# Altium PCB design5.PcbDoc
Units mm, origin at the board's own origin, x right, y up, seen from the top; angles counter-clockwise.
Board outline 22.01 x 100 mm, 2 copper layers (Top Layer, Bottom Layer); 54 components, 35 nets, 174 pads, 186 vias.
Unrouted connection lines stored in the file: 53.
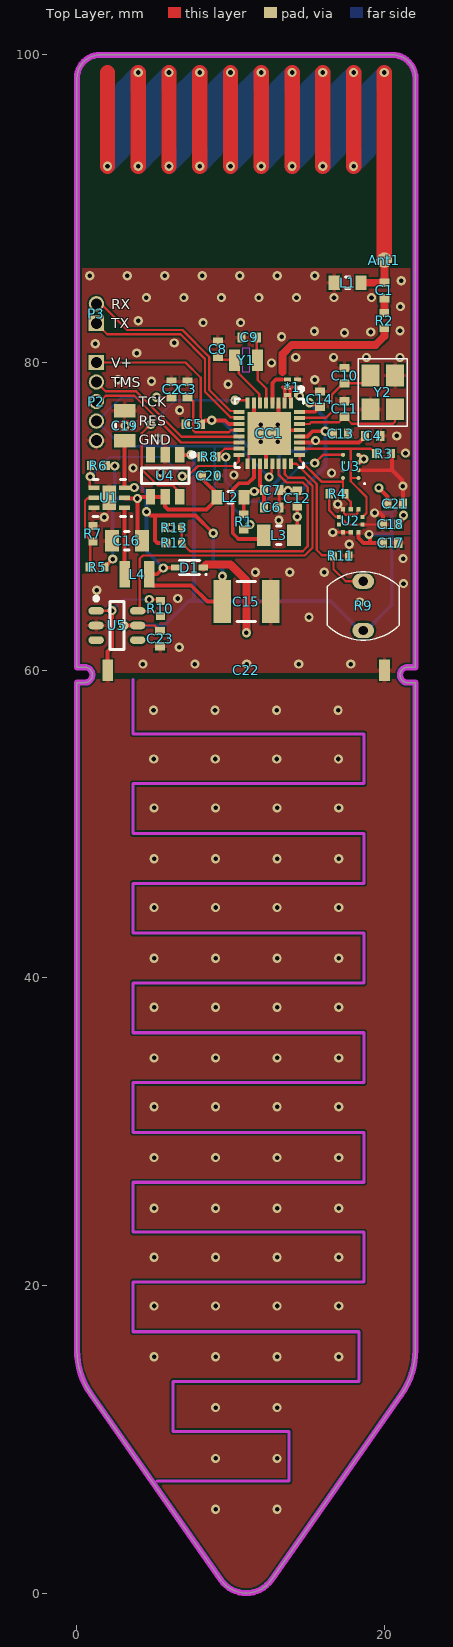
[diagram p0: Top Layer view]
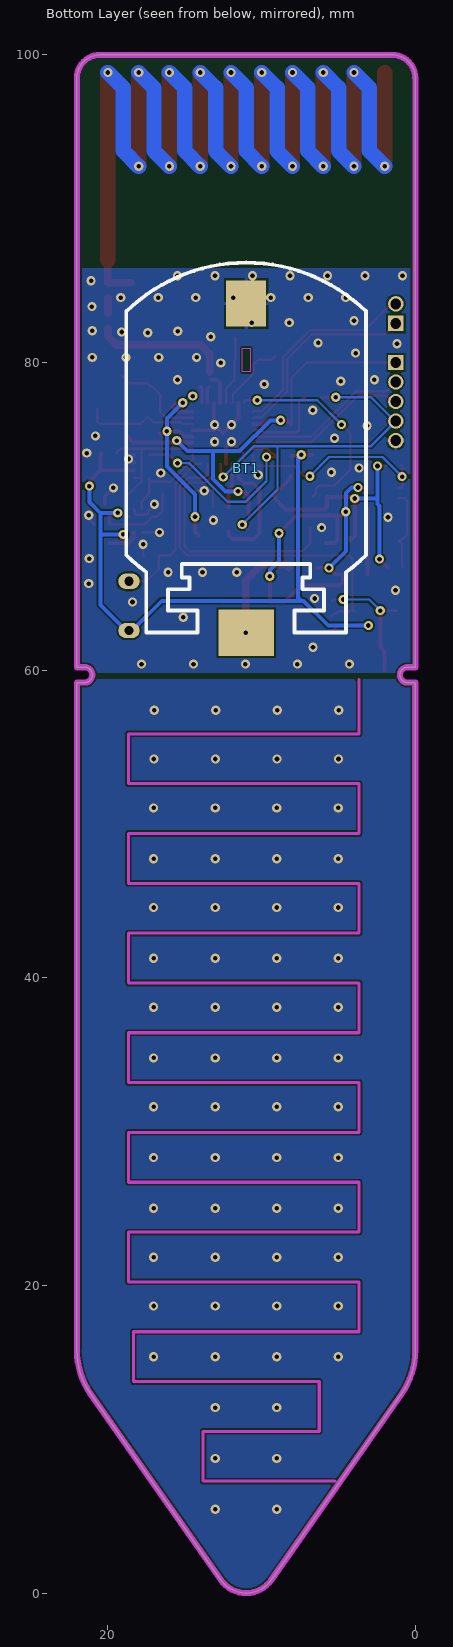
[diagram p1: Bottom Layer view, seen from below]
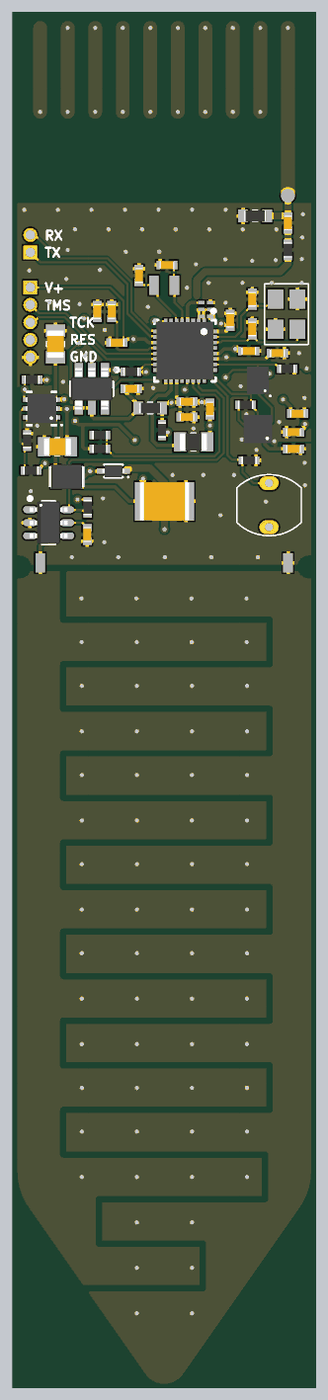
[diagram p2: 3D render of the assembled board from above, using the file's embedded part models]

## Layer stack, top to bottom
Top Solder: solder mask 0.0102, Solder Resist, Dk 3.5
Top Layer: signal copper 0.0356
Dielectric 1: dielectric 0.32, FR-4, Dk 4.8
Bottom Layer: signal copper 0.0356
Bottom Solder: solder mask 0.0102, Solder Resist, Dk 3.5

## Board outline
0.911,12.938 cw(c5.006,15.806) 0.006,15.806 0.006,59.198 0.508,59.198 ccw(c0.508,59.698) 0.501,60.198 0.001,60.198 0.001,98.506 0.006,98.506 cw(c1.506,98.506) 1.506,100.006 20.506,100.006 cw(c20.506,98.506) 22.006,98.506 22.006,60.198 21.513,60.198 ccw(c21.506,59.698) 21.506,59.198 22.006,59.198 22.006,15.806 cw(c17.006,15.806) 21.102,12.938 12.645,0.859 cw(c11.006,2.006) 9.368,0.859

## Design rules (kind name [scope] priority, off if disabled: settings)
Clearance [All] p1: gap=0.127 ignorepadtopadclearanceinfootprint=FALSE
DiffPairsRouting [All] p1: maxlimit=0.127 minlimit=0.127 mostfreqgap=0.127 toplayer_minwidth=0.218 toplayer_maxwidth=0.218 toplayer_prefwidth=0.218 bottomlayer_minwidth=0.218 bottomlayer_maxwidth=0.218 bottomlayer_prefwidth=0.218 maxuncoupledlength=12.7
Height Height_1 [InComponent('U2')] p1: minheight=0 maxheight=100 prefheight=12.7
Height [All] p2: minheight=0 maxheight=25.4 prefheight=12.7
HoleSize [All] p1: absolutevalues=TRUE maxlimit=2.54 minlimit=0.3 maxpercent=80.000 minpercent=20.000
MinimumSolderMaskSliver [All] p1: minsoldermaskwidth=0.127
PlaneClearance [All] p1: clearance=0.127
PlaneConnect [All] p1: planeconnectstyle=Direct reliefexpansion=0.508 reliefentries=4 reliefconductorwidth=0.254 reliefairgap=0.254
PolygonConnect [All] p1: thpad.connectstyle=Relief thpad.reliefconductorwidth=0.254 thpad.reliefentries=4 thpad.polygonreliefangle="90 Angle" thpad.airgapwidth=0.127 smdpad.connectstyle=Relief smdpad.reliefconductorwidth=0.254 smdpad.reliefentries=4 smdpad.polygonreliefangle="90 Angle" smdpad.airgapwidth=0.127 via.connectstyle=Direct via.reliefconductorwidth=0.254 via.reliefentries=4 via.polygonreliefangle="90 Angle" via.airgapwidth=0.254
RoutingVias [All] p1: holewidth=0.4 width=0.7 viastyle="Through Hole" minholewidth=0.3 minwidth=0.6 maxholewidth=0.5 maxwidth=0.8
SilkToSilkClearance [All] p1: silktosilkclearance=0.152
SolderMaskExpansion [All] p1: expansion=0.127
Width Width_50ohm [InNet('Net*1_1') OR InNet('NetAnt1_1')] p1: maxlimit=1.27 minlimit=0.508 preferedwidth=0.508 minimp=50.000000 maximp=50.000000 favimp=50.000000
Width [All] p2: maxlimit=0.254 minlimit=0.127 preferedwidth=0.152 minimp=50.000000 maximp=50.000000 favimp=50.000000
23 further rules are at their usual default settings.

## Classes and differential pairs
differential pair RF: +RF_P -RF_N

## Components (designator, comment, footprint, x,y, rotation, side; value= is the part's Value field where it differs from the comment)
*1 "0850BM14E0016" 0850BM14E0016 14.021,78.392 r90 top
Ant1 "Antenna 868 Helix" ANTENNA_868_HELIX 19.99,86.665 r180 top locked net-tie
BT1 "Battery Coin Cell" S8421-45R 10.998,64 r180 bottom
C1 "Cap" "0402 (CAP)" 19.99,84.692 r90 top value=8.2pF
C2 "Cap" "0402 (CAP)" 6.147,78.257 r90 top value=100nF
C3 "Cap" "0402 (CAP)" 7.188,78.257 r270 top value=1uF
C4 "Cap" "0402 (CAP)" 19.228,75.235 r180 top value=100nF
C5 "Cap" "0402 (CAP)" 7.569,75.997 r0 top value=100nF
C6 "Cap" "0402 (CAP)" 12.662,70.591 r180 top value=22uF
C7 "Cap" "0402 (CAP)" 12.662,71.709 r180 top value=100nF
C8 "Cap" "0402 (CAP)" 9.169,80.874 r270 top value=12pF
C9 "Cap" "0402 (CAP)" 11.201,81.636 r0 top value=12pF
C10 "DNM" "0402 (CAP)" 17.399,79.146 r270 top value=12pF
C11 "DNM" "0402 (CAP)" 17.399,76.987 r270 top value=12pF
C12 "Cap" "0402 (CAP)" 14.326,71.171 r270 top value=22uF
C13 "Cap" "0402 (CAP)" 17.145,75.387 r180 top value=100nF
C14 "Cap" "0402 (CAP)" 15.799,77.622 r270 top value=100nF
C15 "GRM32EC70J107ME15L" "1210 (CAP)" 11.024,64.465 r180 top value=100uF
C16 "Cap" "0805 (CAP)" 3.251,68.428 r0 top value=22uF
C17 "Cap" "0402 (CAP)" 20.396,68.275 r180 top value=100nF
C18 "Cap" "0402 (CAP)" 20.396,69.494 r180 top value=100nF
C19 "Cap" "0805 (CAP)" 3.099,75.895 r270 top value=10uF
C20 "Cap" "0402 (CAP)" 8.611,72.644 r180 top value=1uF
C21 "Cap" "0402 (CAP)" 20.696,70.841 r0 top value=100nF
C22 "Chumidity" SOIL_CAP 11,17 r0 top locked net-tie value=1pF
C23 "Cap" "0402 (CAP)" 5.41,62.052 r90 top value=100nF
CC1 "CC1310F32RSMR" CC1310F32RSMR 12.506,75.406 r270 top
D1 "RB751S40T5G" SOD-523 7.315,66.675 r180 top
L1 "Inductor" "0603 (IND)" 17.602,85.192 r180 top value=68nH
L2 "BLM18HE152SN1D" "0603 (IND)" 9.982,71.247 r0 top value="1500 Ohm"
L3 "MLZ2012N6R8LT000" "0805 (IND)" 13.132,68.783 r0 top value=6.8uH
L4 "Inductor" SRN2009T 3.912,66.243 r180 top value=3.3uH
P2 "cJTAG" 5pin-1.27 1.27,77.47 r270 top
P3 "UART" 2pin-1.27 1.27,83.185 r90 top
R1 "Res1" "0402 (RES)" 10.846,69.647 r90 top value=100K
R2 "" "0402 (RES)" 19.99,82.728 r90 top value=0
R3 "Res1" "0402 (RES)" 19.939,74.092 r0 top value=4.7K
R4 "Res1" "0402 (RES)" 16.916,71.476 r180 top value=4.7K
R5 "DNM" "0402 (RES)" 1.321,66.713 r180 top value=0
R6 "Res1" "0402 (RES)" 1.397,73.304 r180 top value=10K
R7 "DNM" "0402 (RES)" 1.041,68.877 r90 top value=0
R8 "Res1" "0402 (RES)" 8.591,73.889 r0 top value=4.7K
R9 "200K - 10K" Photoresistor 18.618,64.186 r90 top
R10 "Rcharge" "0402 (RES)" 5.43,64.008 r270 top value=1k
R11 "Res1" "0402 (RES)" 17.17,67.437 r180 top value=4.7K
R12 "Res1" "0402 (RES)" 6.325,68.275 r180 top value=4.7K
R13 "Res1" "0402 (RES)" 6.325,69.274 r0 top value=4.7K
U1 "TPS61291" TPS61291 2.1,71.206 r180 top
U2 "BMP388, Pressure sensor" BMP388 17.805,69.723 r270 top
U3 "HDC1010, Humidity, Temp" HDC1010 17.805,73.254 r180 top
U4 "TPS22860" SOT23-5 5.74,72.644 r270 top
U5 "74LVC2G14, Inverting Schmitt Trigger" 74LVC2G14 2.603,62.912 r0 top
Y1 "FC-12M 32.7680KA-A3" "FC-12M 32.7680KA-A3" 10.998,80.162 r0 top
Y2 "TSX-3225 24.0000MF20G-AC3" "TSX-3225 24.0000MF20G-AC3" 19.886,78.062 r270 top

## Footprints (in the part's own frame and the unit in brackets; to place one, negate y for a bottom-side part, rotate by r counter-clockwise, add the part's x,y. Pads: shape width x height; smd on the part's side, far side on the other; paste and mask are expansions set on the pad)
2pin-1.27 [mm]
  rect 1x1 hole 0.7: 1(-0.635,0)
  round 1 hole 0.7: 2(0.635,0)
5pin-1.27 [mm]
  rect 1x1 hole 0.7: 1(-2.54,0)
  round 1 hole 0.7: 2(-1.27,0) 3(0,0) 4(1.27,0) 5(2.54,0)
74LVC2G14 [mm] "TSOP, 6-Leads, Body 2,90x1,50mm, Pitch 0,95mm, IPC Medium Density"
  oval 1x0.5 smd: 1(-1.35,0.95) 2(-1.35,0) 3(-1.35,-0.95) 4(1.35,-0.95) 5(1.35,0) 6(1.35,0.95)
  silkscreen extent -1.47,-1.55 0.45,1.87, body extent -1.38,-1.55 1.38,1.55, height 1.1
"0402 (CAP)" [mm] "Chip Capacitor, 2-Leads, Body 1,60x0,80mm, IPC Medium Density"
  rect 0.54x0.64 smd: 1(-0.5,0) 2(0.5,0)
  body extent -0.55,-0.3 0.55,0.3, height 0.4
"0402 (RES)" [mm] "Chip Resistor, 2-Leads, Body 1,00x0,50mm, IPC Medium Density"
  rect 0.5x0.6 smd: 1(-0.5,0) 2(0.5,0)
  body extent -0.55,-0.3 0.55,0.3, height 0.4
"0603 (IND)" [mm]
  rect 0.72x0.94 smd: 1(-0.87,0) 2(0.87,0)
  silkscreen extent -0.15,-0.37 0.15,0.37, body extent -0.8,-0.4 0.8,0.4, height 0.6
"0805 (CAP)" [mm] "Chip Capacitor, 2-Leads, Body 2,00x1,25mm, IPC Medium Density"
  rect 0.9x1.4 smd: 1(-0.975,0) 2(0.975,0)
  silkscreen extent -0.15,-0.6 0.15,0.6, body extent -1,-0.63 1,0.63, height 0.6
"0805 (IND)" [mm] "Chip Inductor, 2-Leads, Body 2,00x1,25mm, IPC Medium Density"
  rect 0.9x1.39 smd: 1(-0.98,0) 2(0.98,0)
  silkscreen extent -0.15,-0.6 0.15,0.6, body extent -1,-0.63 1,0.63, height 0.6
0850BM14E0016 [mm]
  rect 0.25x0.45 smd: 1(0.5,0.325) 2(0,0.325) 3(-0.5,0.325) 4(-0.5,-0.325) 5(0,-0.325) 6(0.5,-0.325)
  body extent -0.74,-0.66 0.74,0.66, height 1
"1210 (CAP)" [mm] "Chip Capacitor, 2-Leads, Body 3,20x2,50mm, IPC Medium Density"
  rect 1.15x2.8 smd: 1(-1.575,0) 2(1.575,0)
  silkscreen extent -0.6,-1.3 0.6,1.3, body extent -1.8,-1.4 1.8,1.4, height 2.8
ANTENNA_868_HELIX [mm]
  round 1 smd: 1(0,0)
  Top Layer lines w1: 18,-6.1 18,-12.2 ; 16,-6.1 16,-12.2 ; 14,-6.1 14,-12.2 ; 12,-6.1 12,-12.2 ; 10,-6.1 10,-12.2 ; 8,-6.1 8,-12.2 ; 6,-6.1 6,-12.2 ; 4,-6.1 4,-12.2 ; 2,-6.1 2,-12.2 ; 0,0 0,-12.2
  Bottom Layer lines w1: 18,-6.1 17,-7.1 17,-11.2 16,-12.2 ; 16,-6.1 15,-7.1 15,-11.2 14,-12.2 ; 14,-6.1 13,-7.1 13,-11.2 12,-12.2 ; 12,-6.1 11,-7.1 11,-11.2 10,-12.2 ; 10,-6.1 9,-7.1 9,-11.2 8,-12.2 ; 8,-6.1 7,-7.1 7,-11.2 6,-12.2 ; 6,-6.1 5,-7.1 5,-11.2 4,-12.2 ; 4,-6.1 3,-7.1 3,-11.2 2,-12.2 ; 2,-6.1 1,-7.1 1,-11.2 0,-12.2
BMP388 [mm] "LGA, 10-Leads, Body 2,00x2,00mmx0,80mm, Pitch 0,50mm"
  rect 0.275x0.275 smd: 1(0.25,0.762) 2(-0.25,0.762) 3(-0.75,0.5) 4(-0.75,0) 5(-0.75,-0.5) 6(-0.25,-0.763) 7(0.25,-0.763) 8(0.75,-0.5) 9(0.75,0) 10(0.75,0.5)
  body extent -1.02,-1.03 1.65,1.02, height 30
CC1310F32RSMR [mm] "QFN, 32-Leads, Body 4,00x4,00mm, Pitch 0,40mm, Thermal Pad 2,80x2,80mm, IPC Medium Density"
  rect 0.7x0.26 smd: 1(-1.975,1.4) 2(-1.975,1) 3(-1.975,0.6) 4(-1.975,0.2) 5(-1.975,-0.2) 6(-1.975,-0.6) 7(-1.975,-1) 8(-1.975,-1.4) 17(1.975,-1.4) 18(1.975,-1) 19(1.975,-0.6) 20(1.975,-0.2) 21(1.975,0.2) 22(1.975,0.6) 23(1.975,1) 24(1.975,1.4)
  rect 0.26x0.7 smd: 9(-1.4,-1.975) 10(-1,-1.975) 11(-0.6,-1.975) 12(-0.2,-1.975) 13(0.2,-1.975) 14(0.6,-1.975) 15(1,-1.975) 16(1.4,-1.975) 25(1.4,1.975) 26(1,1.975) 27(0.6,1.975) 28(0.2,1.975) 29(-0.2,1.975) 30(-0.6,1.975) 31(-1,1.975) 32(-1.4,1.975)
  rect 2.8x2.8 smd: 33(0,0)
  silkscreen extent -3,-2.22 2.22,2.22, body extent -2.08,-2.08 2.08,2.08, height 1
"FC-12M 32.7680KA-A3" [mm]
  rect 0.7x1.4 smd: 1(-0.75,0) 2(0.75,0)
  Keep-Out Layer region: -0.254,-0.762 0.254,-0.762 0.254,0.762 -0.254,0.762
  body extent -1.19,-0.79 1.19,0.79, height 1
HDC1010 [mm] "BGA, 8-Leads, Body 1,59x2,04mmx0,68mm, Pitch 0,50mm"
  round 0.26 smd: A1(-0.5,0.75) A2(0.5,0.75) B1(-0.5,0.25) B2(0.5,0.25) C1(-0.5,-0.25) C2(0.5,-0.25) D1(-0.5,-0.75) D2(0.5,-0.75)
  silkscreen extent -0.95,1.08 -0.85,1.17, body extent -0.79,-1.02 0.79,1.02, height 0.67
Photoresistor [mm]
  oval 1x1.4 hole 0.6: 1(-1.6,0) 2(1.6,0)
  silkscreen extent -2.22,-2.35 2.22,2.35
S8421-45R [mm]
  rect 3.6x3 smd: 1(0,-1.556)
  rect 2.6x3 smd: 2(0,19.844)
  silkscreen extent -7.8,-1.56 7.8,22.5
SOD-523 [mm] "Molded Diode, 2-Leads, Body 1,20x0,80mm, IPC Medium Density"
  rect 0.6x0.4 smd: 1(-0.9,0) 2(0.9,0)
  silkscreen extent -1.12,-0.45 0.65,0.5, body extent -0.87,-0.45 0.87,0.45, height 0.7
SOIL_CAP [mm]
  rect 0.7x1.4 smd: 1(-9,43) 2(9,43)
  Keep-Out Layer lines w0.2: -7.339,42.393 -7.339,38.867 7.661,38.867 7.661,35.628 -7.339,35.628 -7.339,32.389 7.661,32.389 7.661,29.15 -7.339,29.15 -7.339,25.911 7.661,25.911 7.661,22.672 -7.339,22.672 -7.339,19.434 7.661,19.434 7.661,16.195 -7.339,16.195 -7.339,12.956 7.661,12.956 7.661,9.717 -7.339,9.717 -7.339,6.478 7.661,6.478 7.661,3.239 -7.339,3.239 -7.339,0 7.339,0 7.339,-3.239 -4.749,-3.239 -4.749,-6.478 2.803,-6.478 2.803,-9.717 -5.777,-9.717
SOT23-5 [mm] "SOT23, 5-Leads, Body 2,90x2,80mm, Pitch 0,95mm, IPC Medium Density"
  rect 1x0.6 smd: 1(-1.375,0.95) 2(-1.375,0) 3(-1.375,-0.95) 4(1.375,-0.95) 5(1.375,0) 6(1.375,0.95)
  silkscreen extent -1.5,-1.55 0.5,1.93, body extent -1.5,-1.53 1.5,1.53, height 1.45
SRN2009T [mm] "Molded Inductor, 2-Leads, Body 2,00x1,60mm, IPC Medium Density"
  rect 0.7x1.7 smd: 1(-0.8,0) 2(0.8,0)
  body extent -1.32,-0.9 1.32,0.9, height 0.95
TPS61291 [mm] "SON, 6-Leads, Body 2,00x2,00mm, Pitch 0,65mm, Thermal Pad 1,60x0,89mm, IPC Medium Density"
  rect 0.7x0.3 smd: 1(-0.995,0.65) 2(-0.995,0) 3(-0.995,-0.65) 4(0.995,-0.65) 5(0.995,0) 6(0.995,0.65)
  rect 0.89x1.6 smd: 7(0,0)
  silkscreen extent -1.5,-1.2 1.05,1.25, body extent -1.13,-1.05 1.13,1.05, height 0.8
"TSX-3225 24.0000MF20G-AC3" [mm]
  rect 1.4x1.15 smd: 1(-1.1,-0.8) 2(1.1,-0.8) 3(1.1,0.8) 4(-1.1,0.8)
  silkscreen extent -2.2,-1.6 2.2,1.6, body extent -2.2,-1.6 2.2,1.6, height 1

## Part data
C1: "Capacitor", Part Number=250R05L8R2CV4T, LatestRevisionDate=17-Jul-2002, LatestRevisionNote="Re-released for DXP Platform.", PackageDescription="Radial Cap, Thru-Hole; 2 Leads; 0.3 in Pin Spacing", PackageReference=RAD-0.3, Published=8-Jun-2000, Publisher="Altium Limited"
C2 C4 C5 C7 C13 C14 C17 C18 C21 C23: "Capacitor", Part Number=GCM155R71C104KA55J, LatestRevisionDate=17-Jul-2002, LatestRevisionNote="Re-released for DXP Platform.", PackageDescription="Radial Cap, Thru-Hole; 2 Leads; 0.3 in Pin Spacing", PackageReference=RAD-0.3, Published=8-Jun-2000, Publisher="Altium Limited"
C3 C19 C20: "Capacitor", LatestRevisionDate=17-Jul-2002, LatestRevisionNote="Re-released for DXP Platform.", PackageDescription="Radial Cap, Thru-Hole; 2 Leads; 0.3 in Pin Spacing", PackageReference=RAD-0.3, Published=8-Jun-2000, Publisher="Altium Limited"
C6 C12 C16: "Capacitor", Part Number=GRM219B31A226MEA0D, LatestRevisionDate=17-Jul-2002, LatestRevisionNote="Re-released for DXP Platform.", PackageDescription="Radial Cap, Thru-Hole; 2 Leads; 0.3 in Pin Spacing", PackageReference=RAD-0.3, Published=8-Jun-2000, Publisher="Altium Limited"
C8 C9: "Capacitor", Part Number=GCM1555G1H120JA16D, LatestRevisionDate=17-Jul-2002, LatestRevisionNote="Re-released for DXP Platform.", PackageDescription="Radial Cap, Thru-Hole; 2 Leads; 0.3 in Pin Spacing", PackageReference=RAD-0.3, Published=8-Jun-2000, Publisher="Altium Limited"
C10 C11: library part Cap, "Capacitor", Part Number=GCM1555G1H120JA16D, LatestRevisionDate=17-Jul-2002, LatestRevisionNote="Re-released for DXP Platform.", PackageDescription="Radial Cap, Thru-Hole; 2 Leads; 0.3 in Pin Spacing", PackageReference=RAD-0.3, Published=8-Jun-2000, Publisher="Altium Limited"
C15: library part Cap, "Capacitor", Part Number=GCM155R71C104KA55J, LatestRevisionDate=17-Jul-2002, LatestRevisionNote="Re-released for DXP Platform.", PackageDescription="Radial Cap, Thru-Hole; 2 Leads; 0.3 in Pin Spacing", PackageReference=RAD-0.3, Published=8-Jun-2000, Publisher="Altium Limited"
C22: library part Cap, "Capacitor", LatestRevisionDate=17-Jul-2002, LatestRevisionNote="Re-released for DXP Platform.", PackageDescription="Radial Cap, Thru-Hole; 2 Leads; 0.3 in Pin Spacing", PackageReference=RAD-0.3, Published=8-Jun-2000, Publisher="Altium Limited"
D1: library part "D Schottky", "Schottky Diode", Code_JEDEC=DO-214-AA, LatestRevisionDate=17-Jul-2002, LatestRevisionNote="Re-released for DXP Platform.", PackageDescription="DO-214-AA/SMB; 2 C-Bend Leads; Body 5.3 x 3.6 mm, inc. leads (LxW)", PackageReference=SMB, Part Number=RB751S40T5G, Published=8-Jun-2000, Publisher="Altium Limited"
L1: Part Number=PE-0603CD680GTT, Code_IEC=1005, Code_JEITA=0603, LatestRevisionDate=29-May-2009, LatestRevisionNote="IPC-7351 Footprint Added.", PackageDescription="Chip Inductor", PackageReference=0603, Published=8-Jun-2000, Publisher="Altium Limited"
L2: library part "Inductor Iron", "Magnetic-Core Inductor", LatestRevisionDate=17-Jul-2002, LatestRevisionNote="Re-released for DXP Platform.", PackageDescription="Axial Device, Thru-Hole; 2 Leads; 0.9 in Pin Spacing", PackageReference=AXIAL-0.9, Part Number=BLM18HE152SN1D, Published=24-Mar-1999, Publisher="Altium Limited"
L3: library part Inductor, "Inductor", Code_IEC=1005, Code_JEITA=0402, LatestRevisionDate=29-May-2009, LatestRevisionNote="IPC-7351 Footprint Added.", PackageDescription="Chip Inductor", PackageReference=0402-A, Part Number=MLZ2012N6R8LT000, Published=8-Jun-2000, Publisher="Altium Limited"
L4: Part Number=SRN2009T, Code_IEC=1005, Code_JEITA=0402, LatestRevisionDate=29-May-2009, LatestRevisionNote="IPC-7351 Footprint Added.", PackageDescription="Chip Inductor", PackageReference=0402-A, Published=8-Jun-2000, Publisher="Altium Limited"
P2: library part "Header 5", "Header, 5-Pin", LatestRevisionDate=17-Jul-2002, LatestRevisionNote="Re-released for DXP Platform.", Publisher="Altium Limited"
P3: library part "Header 2", "Header, 2-Pin", LatestRevisionDate=17-Jul-2002, LatestRevisionNote="Re-released for DXP Platform.", Publisher="Altium Limited"
R1: "Resistor", Part Number=CRCW0402100KFKED, LatestRevisionDate=17-Jul-2002, LatestRevisionNote="Re-released for DXP Platform.", PackageDescription="Axial Device, Thru-Hole; 2 Leads; 0.3 in Pin Spacing", PackageReference=AXIAL-0.3, Published=8-Jun-2000, Publisher="Altium Limited"
R2 R5 R7: library part Res1, "Resistor", Part Number=ERJ-2GE0R00X, LatestRevisionDate=17-Jul-2002, LatestRevisionNote="Re-released for DXP Platform.", PackageDescription="Axial Device, Thru-Hole; 2 Leads; 0.3 in Pin Spacing", PackageReference=AXIAL-0.3, Published=8-Jun-2000, Publisher="Altium Limited"
R3 R4 R8 R11 R12 R13: "Resistor", Part Number=CRG0402F4K7, LatestRevisionDate=17-Jul-2002, LatestRevisionNote="Re-released for DXP Platform.", PackageDescription="Axial Device, Thru-Hole; 2 Leads; 0.3 in Pin Spacing", PackageReference=AXIAL-0.3, Published=8-Jun-2000, Publisher="Altium Limited"
R6: "Resistor", Part Number=CRCW040210K0JNEDC, LatestRevisionDate=17-Jul-2002, LatestRevisionNote="Re-released for DXP Platform.", PackageDescription="Axial Device, Thru-Hole; 2 Leads; 0.3 in Pin Spacing", PackageReference=AXIAL-0.3, Published=8-Jun-2000, Publisher="Altium Limited"
R9: library part "Photo Resistor"
R10: library part Res1, "Resistor", Part Number=RC0402FR-7W1KL, LatestRevisionDate=17-Jul-2002, LatestRevisionNote="Re-released for DXP Platform.", PackageDescription="Axial Device, Thru-Hole; 2 Leads; 0.3 in Pin Spacing", PackageReference=AXIAL-0.3, Published=8-Jun-2000, Publisher="Altium Limited"
U1: Part Number=TPS61291DRVR
U2: library part BMP388, Part Number=BMP388
U3: library part HDC1010, Part Number=HDC1010YPAR
U4: Part Number=TPS22860DBVR
U5: library part 74LVC2G14, Part Number=74LVC2G14GV,125
Y1: library part XTAL, "Crystal Oscillator", LatestRevisionDate=17-Jul-2002, LatestRevisionNote="Re-released for DXP Platform.", PackageDescription="Crystal, Thru-Hole; 2 Leads; Body 3.1 x 8.2 mm (Dia.xH)", PackageReference=R38, Part Number="FC-12M 32.7680KA-A3", Published=8-Jun-2000, Publisher="Altium Limited"
Y2: library part Crystal, Part Number="TSX-3225 24.0000MF20G-AC3"
*1: Part Number=0850BM14E0016
CC1: Part Number=CC1310F32RSMR

## Via types
v1: diameter 0.6, hole 0.3, Top Layer to Bottom Layer, tented both sides, 185 vias
v2: diameter 0.6, hole 0.3, Top Layer to Bottom Layer, 1 vias

## Nets (pads, with @x,y where several pads share a name; then routed paths per layer and width w, separated by ;. In a path a pad name is that pad's centre, name@x,y a point inside that pad or via, vN(x,y) a via of type N, cw(c..) or ccw(c..) an arc to the next point about the centre after c; other vN are vias at no path point)
Bat_Sense: CC1.22 R12.1 R13.2 | length 16.3
  Top Layer w0.152: R13.2 R12.1 7.358,67.742 14.681,67.742 15.011,68.072 15.011,71.882 14.681,72.212 13.626,72.212 13.106,72.732 CC1.22
DCDC_SW: CC1.18 L3.1 | length 8
  Top Layer w0.254: CC1.18 11.506,72.542 11.125,72.161 10.54,72.161 10.135,71.756 10.135,68.91 10.363,68.682 10.363,68.678 10.512,68.529 11.898,68.529 L3.1 L3.1@12.152,69.028
DRDYn: CC1.15 R8.2 U3.D2 | length 13.3
  Top Layer w0.152: v1(9.677,73.863) 9.116,73.863 R8.2 9.091,73.939 9.264,74.112 9.314,74.112 9.608,74.406 CC1.15 ; v1(15.469,73.47) 16.002,74.004 U3.D2
  Bottom Layer w0.152: v1(9.677,73.863) 9.677,72.313 11.046,70.945 12.195,70.945 14.72,73.47 v1(15.469,73.47)
EN_BYP: CC1.16 R6.2 U1.4 | length 13.4
  Top Layer w0.152: R6.2@0.897,73.354 R6.2 0.762,73.169 0.864,73.068 v1(0.864,72.593) 0.831,72.561 0.831,71.929 0.905,71.856 U1.4 ; v1(6.858,72.619) 7.208,72.619 7.868,73.279 10.197,73.279 10.531,73.614 CC1.16
  Bottom Layer w0.152: v1(0.864,72.593) 2.134,73.863 5.613,73.863 v1(6.858,72.619)
GND: *1.5 *1.6 BT1.2 C2.2 C3.1 C4.1 C5.1 C6.1 C7.1 C8.1 C9.1 C10.1 C11.1 C12.1 C13.1 C14.1 C15.1 C16.1 C17.1 C18.1 C19.1 C20.1 C21.1 C22.2 C23.1 CC1.3 CC1.7 CC1.17 CC1.20 CC1.29 CC1.33 L1.2 P2.5 R7.2 R11.1 R13.1 U1.6 U1.7 U2.3 U2.5 U2.8 U2.9 U3.B2 U3.C1 U3.D1 U4.2 U5.2 Y2.2 Y2.4 | length 19
  Top Layer w0.127: CC1.17 11.17,73.495 11.17,74.07 v1(11.956,74.856)
  Top Layer w0.152: R13.1 6.01,69.088 6.096,69.174 v2(6.096,69.274) ; C6.1 C7.1 13.2,71.671 v1(13.723,71.671) C12.1 ; v1(16.637,68.961) 16.643,68.967 17.299,68.967 U2.8 U2.9 ; v1(16.967,70.79) 16.989,70.79 U2.5 17.367,70.412 17.367,70.212 17.474,70.104 18.136,70.104 18.244,70.212 18.244,70.412 U2.3 ; R11.1 17.704,67.47 v1(17.704,68.199)
  Top Layer w0.254: CC1.7 11.506,76.406 v1(11.956,75.956) CC1.33 v1(13.056,75.956) 13.106,76.006 CC1.3 ; v1(11.956,74.856) 12.306,74.506 CC1.20 ; CC1.33@13.056,75.606 CC1.29 ; U3.C1 18.411,73.504 v1(18.644,73.736) 18.376,74.004 U3.D1 ; v1(19.634,71.857) 20.196,71.295 C21.1 ; C18.1 21.234,69.833 v1(21.234,70.079)
  other v1: 9.018,5.461 13.018,5.461 9.018,12.065 13.018,12.065 5.018,18.669 9.018,18.669 13.018,18.669 17.018,18.669 5.018,25.019 9.018,25.019 13.018,25.019 17.018,25.019 5.018,31.623 9.018,31.623 13.018,31.623 17.018,31.623 5.018,38.1 9.018,38.1 13.018,38.1 17.018,38.1 5.018,44.577 9.018,44.577 13.018,44.577 17.018,44.577 5.018,51.054 9.018,51.054 13.018,51.054 17.018,51.054 4.982,57.404 8.982,57.404 12.982,57.404 16.982,57.404 4.293,60.401 7.671,60.401 11.049,60.401 14.427,60.401 17.805,60.401 6.655,61.493 15.088,63.449 18.39,64.44 6.553,64.668 1.295,65.202 21.234,65.634 11.608,66.37 13.843,66.37 16.078,66.37 21.209,67.259 13.132,69.759 1.778,69.952 10.211,72.695 16.561,72.822 5.461,72.873 3.658,73.152 21.361,74.117 13.056,74.856 5.258,75.082 20.803,75.235 3.144,75.895 6.68,76.911 9.83,78.588 4.851,78.791 2.667,78.892 15.469,78.892 12.649,79.985 14.224,80.34 16.688,80.34 18.821,80.34 21.006,80.34 3.886,80.62 1.194,81.229 6.325,81.28 13.31,81.686 17.399,81.94 19.101,81.991 15.443,82.042 21.006,82.067 8.204,82.601 10.643,82.601 3.988,82.728 21.031,83.642 4.521,84.226 6.96,84.226 9.398,84.226 11.836,84.226 14.275,84.226 16.713,84.226 19.152,84.226 21.082,85.319 0.838,85.649 3.277,85.649 5.715,85.649 8.153,85.649 10.592,85.649 13.03,85.649 15.469,85.649
JTAG_TCK: CC1.14 P2.3 | length 10.7
  Top Layer w0.152: P2.3 1.499,77.47 1.88,77.851 3.734,77.851 6.778,74.806 CC1.14
JTAG_TMS: CC1.13 P2.2 | length 10.7
  Top Layer w0.152: P2.2 1.88,78.13 3.861,78.13 6.807,75.184 10.509,75.184 CC1.13
Net*1_1: *1.1 R2.1 | length 8.8
  Top Layer w0.508: 13.371,79.398 13.371,80.554 13.97,81.153 19.431,81.153 19.99,81.712 R2.1
Net*1_2: *1.2 CC1.4 | length 2
  Top Layer w0.254: CC1.4 12.706,78.67 12.929,78.892 13.326,78.892
NetAnt1_1: Ant1.1 C1.2 L1.1 | length 2.8
  Top Layer w0.508: L1.1 C1.2 19.995,85.197 19.995,86.495 Ant1.1@20,86.5
  other v1: 1.99,92.765 3.99,92.765 5.99,92.765 7.99,92.765 9.99,92.765 11.99,92.765 13.99,92.765 15.99,92.765 17.99,92.765 3.99,98.865 5.99,98.865 7.99,98.865 9.99,98.865 11.99,98.865 13.99,98.865 15.99,98.865 17.99,98.865 19.99,98.865
NetBT1_1: BT1.1 D1.1 | length 6.7
  Top Layer w0.508: D1.1 8.215,66.683 8.41,66.878 9.982,66.878 11.024,65.837 v1(11.024,62.433)
NetC1_1: C1.1 R2.2 | length 1
  Top Layer w0.508: R2.2 C1.1
NetC3_2: C3.2 CC1.12 | length 5.6
  Top Layer w0.152: C3.2@7.188,77.707 7.238,77.707 7.188,77.657 7.407,77.657 7.569,77.495 7.569,75.584 7.69,75.463 9.855,75.463 9.998,75.606 CC1.12
NetC8_2: C8.2 CC1.6 Y1.1 | length 4.6
  Top Layer w0.152: C8.2 9.363,80.18 10.231,80.18 Y1.1 10.522,79.889 10.522,79.292 11.854,77.96 11.854,77.433 CC1.6
NetC9_2: C9.2 CC1.5 Y1.2 | length 4.5
  Top Layer w0.152: C9.2 11.701,80.209 Y1.2 11.76,80.15 11.76,78.867 12.306,78.321 CC1.5
NetC10_2: C10.2 CC1.31 Y2.1 | length 6.4
  Top Layer w0.152: CC1.31 16.183,76.406 16.586,76.81 16.586,77.927 17.112,78.453 17.205,78.453 C10.2 17.416,78.663 18.587,78.663 Y2.1
NetC11_2: C11.2 CC1.30 Y2.3 | length 7.5
  Top Layer w0.152: CC1.30 15.123,76.006 15.24,76.124 17.035,76.124 C11.2 17.864,76.022 20.549,76.022 20.686,76.16 Y2.3
NetC22_1: C22.1 R10.1 U5.1 | length 8.5
  Top Layer w0.152: U5.1 1.262,63.871 v1@2.276,63.871 ; v1(4.703,64.598) 5.34,64.598 R10.1
  Top Layer w0.254: C22.1 2,61.233 2.276,61.509 v1@2.276,63.871
  Bottom Layer w0.152: v1(2.286,63.881) 3.003,64.598 v1(4.703,64.598)
  other v1: 9.018,8.763 13.018,8.763 5.018,15.367 9.018,15.367 13.018,15.367 17.018,15.367 5.018,21.844 9.018,21.844 13.018,21.844 17.018,21.844 5.018,28.321 9.018,28.321 13.018,28.321 17.018,28.321 5.018,34.798 9.018,34.798 13.018,34.798 17.018,34.798 5.018,41.275 9.018,41.275 13.018,41.275 17.018,41.275 5.018,47.752 9.018,47.752 13.018,47.752 17.018,47.752 5,54.229 9,54.229 13,54.229 17,54.229
NetCC1_24: CC1.24 R9.2 R11.2 | length 10.9
  Top Layer w0.152: CC1.24 14.275,73.431 15.596,72.111 15.596,67.818 15.926,67.488 16.62,67.488 R11.2 16.688,67.42 16.688,66.573 17.475,65.786 R9.2
NetL4_2: L4.2 U1.1 | length 4.3
  Top Layer w0.254: U1.1 3.103,70.547 3.103,66.251 L4.2
NetR5_2: R5.2 R7.1 U1.5 | length 5.3
  Top Layer w0.152: R5.2 0.868,66.76 0.868,68.203 R7.1 0.991,68.377 0.533,68.835 0.533,71.018 0.711,71.196 1.096,71.196 U1.5
PWR_ON: CC1.8 U4.6 | length 13.7
  Top Layer w0.152: v1(4.801,75.971) 4.775,75.971 4.216,75.413 4.216,73.05 5.258,72.009 6.251,72.009 6.467,71.793 6.467,71.493 U4.6 ; v1(10.281,77.556) 11.053,77.556 11.106,77.502 CC1.8
  Bottom Layer w0.152: v1(4.801,75.971) 6.385,77.556 v1(10.281,77.556)
RESET_N: C2.1 CC1.21 P2.4 R1.1 | length 25.8
  Top Layer w0.152: v1(5.182,77.749) 6.139,77.749 C2.1 ; R1.1 10.896,69.147 11.218,69.469 v1(11.252,69.469) ; v1(12.497,72.568) 12.497,72.689 12.661,72.853 12.661,73.386 CC1.21
  Bottom Layer w0.152: v1(5.182,77.749) 2.896,77.749 1.346,76.2 P2.4 2.896,74.574 8.965,74.574 ; v1(11.252,69.469) 8.965,71.756 8.965,74.574 ; v1(12.497,72.568) 10.49,74.574 8.965,74.574
RF_N: *1.3 CC1.2 | length 1.1
  Top Layer w0.218: 13.371,78.392 13.471,78.392 13.487,78.376 13.487,78.285 13.523,78.249 13.523,77.398 CC1.2
RF_P: *1.4 CC1.1 | length 1.1
  Top Layer w0.218: CC1.1 13.885,77.402 13.885,77.665 13.872,77.678 13.872,77.857 13.868,77.861 13.868,78.249 13.905,78.285 13.905,78.376 13.921,78.392 14.021,78.392
  other v1: 14.478,77.826
SCL: CC1.26 R3.1 U2.2 U3.A1 | length 10.6
  Top Layer w0.152: CC1.26 17.802,74.406 ; U3.A1 17.814,72.504 17.805,72.495 ; U2.2 18.826,70.231 18.826,71.272 17.805,72.292 17.805,72.495 ; R3.1 19.439,74.142 19.265,74.316 19.215,74.316 19.124,74.406 17.802,74.406 ; 17.802,74.406 17.805,74.403 17.805,72.495
SDA: CC1.25 R4.1 U2.4 U3.A2 | length 5.9
  Top Layer w0.152: CC1.25 14.481,73.682 15.9,72.263 17.305,72.263 ; U3.A2@17.285,72.483 U3.A2 17.305,72.263 ; R4.1@17.305,71.435 17.305,72.263 ; R4.1@17.416,71.374 17.416,71.338 17.805,70.949 U2.4
SOIL_HUMIDITY: CC1.23 R10.2 U5.6 | length 23.5
  Top Layer w0.152: R10.2@5.48,63.508 R10.2 5.256,63.682 5.203,63.682 5.055,63.83 4.328,63.83 4.297,63.862 U5.6 4.089,63.999 4.089,67.259 4.293,67.462 14.808,67.462 15.316,67.97 15.316,71.984 14.783,72.517 13.741,72.517 13.506,72.752 CC1.23
UART_RX: CC1.9 P3.2 | length 13.4
  Top Layer w0.152: P3.2 1.295,83.795 1.6,83.795 3.277,82.118 6.858,82.118 8.611,80.366 8.611,78.221 9.971,76.86 10.478,76.86 CC1.9
UART_TX: CC1.10 P3.1 | length 13.1
  Top Layer w0.152: P3.1 1.981,81.839 6.731,81.839 8.331,80.239 8.331,78.105 9.976,76.46 10.478,76.46 CC1.10
V_switch: C17.2 C18.2 C21.2 C23.2 R3.2 R4.2 R8.1 R9.1 U2.1 U2.6 U2.10 U3.B1 U4.1 U5.5 | length 58.4
  Top Layer w0.152: U5.5 5.05,62.912 C23.2 ; R4.2 16.416,70.386 16.829,69.973 U2.6 17.111,69.973 17.611,69.473 U2.1 19.875,69.473 C18.2
  Top Layer w0.254: v1(3.053,62.912) U5.5 ; U4.1 6.704,74.005 v1(7.416,74.005) 7.474,73.947 8.032,73.947 R8.1 ; U2.10 18.316,68.963 18.316,68.603 18.644,68.275 19.065,68.275 ; U3.B1 20.476,73.004 20.481,73.009 ; v1(18.999,68.834) 19.065,68.768 19.065,68.275 ; v1(19.355,70.231) 19.71,70.231 19.896,70.045 C18.2 ; C17.2 19.065,68.275 ; R3.2 20.481,74.05 20.481,73.009 ; C21.2 21.194,70.842 21.194,71.97 21.196,71.972 v1(21.193,71.974) 21.127,72.04 21.127,72.363 20.481,73.009
  Bottom Layer w0.254: v1(3.053,62.912) 5.668,62.912 7.272,64.516 7.404,64.516 ; v1(7.416,74.005) 7.62,73.801 7.62,64.732 7.404,64.516 ; v1(18.999,68.834) 20.446,68.834 20.472,68.861 ; v1(19.355,70.231) 20.45,70.231 20.472,70.209 ; v1(21.193,71.974) 21.193,70.929 20.472,70.209 ; 7.404,64.516 16.488,64.516 18.418,62.586 R9.1 18.818,62.586 20.472,64.24 20.472,68.861 ; 20.472,68.861 20.472,70.209
Vbat: C15.2 C19.2 D1.2 L4.1 R12.2 U1.3 | length 30.1
  Top Layer w0.152: D1.2@6.403,66.662 D1.2
  Top Layer w0.254: C19.2@3.228,75.149 3.095,75.016 U1.3 3.108,71.869 3.721,71.869 v1(3.734,71.882) ; v1(4.524,70.307) 4.778,70.053 5.08,70.053 ; R12.2 5.232,68.275 5.08,68.428 5.08,70.053 ; D1.2@6.403,66.662 5.626,66.662 v1(5.613,66.65) 5.207,66.243 L4.1 4.712,65.743 4.935,65.52 7.438,65.52 8.493,64.465 C15.2 9.474,64.491 9.463,64.502 v1(9.463,66.115) ; v1(8.865,68.91) 7.722,70.053 5.08,70.053
  Bottom Layer w0.254: v1@3.786,71.882 4.166,71.882 4.524,71.523 v1(4.524,70.307) 4.524,67.739 v1(5.613,66.65) 5.613,66.743 v1@5.702,66.831 ; v1(8.865,68.91) 8.865,67.107 9.463,66.508 v1(9.463,66.115)
VCC: C16.2 C20.2 L2.1 R5.1 R6.1 U1.2 U4.4 U4.5 | length 21
  Top Layer w0.152: R6.1 2.464,73.304 v1(2.464,73.279)
  Top Layer w0.254: R5.1 v1(2.335,67.227) ; U1.2 3.13,71.171 v1(3.937,71.171) ; C16.2@4.226,68.603 C16.2 3.937,68.717 v1(3.937,71.171) ; C20.2 8.111,72.484 9.23,71.365 L2.1 9.112,71.137 8.435,70.46 5.918,70.46 5.74,70.637 U4.5 U4.4 4.109,71.269 4.046,71.206 3.937,71.206 v1(3.937,71.171)
  Bottom Layer w0.254: v1(2.335,67.227) 2.335,70.686 2.464,70.815 2.464,71.174 ; v1(2.464,73.279) 2.464,71.174 ; v1(3.937,71.171) 2.467,71.171 2.464,71.174
VDDR: C12.2 C13.2 C14.2 CC1.28 CC1.32 L3.2 | length 15
  Top Layer w0.254: L3.2 14.326,68.997 v1(14.326,69.976) C12.2 ; CC1.28 14.484,75.209 14.998,75.209 15.325,75.537 v1(16.154,75.537) 16.154,75.4 16.161,75.394 16.639,75.394 C13.2 ; CC1.32 15.483,76.806 C14.2 15.656,77.265 v1@15.345,77.265
  Bottom Layer w0.254: v1(14.326,69.976) 14.326,71.425 16.154,73.254 v1(16.154,75.537) 16.154,76.363 v1(15.131,77.386)
VDDS: C4.2 C5.2 C6.2 C7.2 CC1.11 CC1.19 CC1.27 L2.2 P2.1 R1.2 | length 34.4
  Top Layer w0.152: P2.1 7.061,80.01 8.052,79.019 8.052,76.014 C5.2
  Top Layer w0.254: C5.2 8.076,76.003 8.082,75.997 8.336,76.251 v1(8.763,76.251) 9.627,76.251 9.871,76.006 CC1.11 ; R1.2 10.849,70.15 10.849,71.244 L2.2 10.852,71.357 11.085,71.59 11.494,71.59 v1(11.532,71.628) 11.572,71.669 12.121,71.669 C7.2 ; CC1.19 11.906,72.014 12.162,71.759 C7.2 ; C6.2 C7.2 ; CC1.27 14.484,74.803 18.346,74.803 18.728,75.185 C4.2
  Bottom Layer w0.254: v1(8.763,76.251) 9.423,76.251 11.43,74.244 14.834,74.244 v1(15.519,74.93) ; v1(11.532,71.628) 12.34,71.628 13.157,72.445 13.157,74.092
pads on no net: U2.7 U3.C2 U4.3 U5.3 U5.4

## Polygon pours and split planes (outlines as drawn)
GND on Top Layer "Top Layer-GND 1" (solid, pour order 76): 22.006,86.146 0,86.146 0,59.849 22.006,59.849
no net on Top Layer "Top Layer-No Net 1" (solid, pour order 74): 14.131,76.907
V_switch on Top Layer "Top Layer-No Net" (solid, pour order 62): 22.006,73.973 18.491,73.973 16.27,71.753 16.27,68.81 22.006,68.81
GND on Top Layer "Top Layer-GND" (solid, pour order 44): 18.661,52.628 18.661,55.867 3.658,55.867 3.658,59.411 22.006,59.411 22.006,15.806 21.504,13.621 12.295,0.477 11,0.006 9.368,0.859 4.87,7.283 13.803,7.283 13.803,10.522 6.251,10.522 6.251,13.761 18.339,13.761 18.339,17 3.661,17 3.661,20.239 18.661,20.239 18.661,23.478 3.661,23.478 3.661,26.717 18.661,26.717 18.661,29.956 3.661,29.956 3.661,33.195 18.661,33.195 18.661,36.434 3.661,36.434 3.661,39.672 18.661,39.672 18.661,42.911 3.661,42.911 3.661,46.15 18.661,46.15 18.661,49.389 3.661,49.389 3.661,52.628
NetC22_1 on Top Layer "Top Layer-NetC28_1" (solid, pour order 14): 3.661,55.867 18.661,55.867 18.661,52.588 3.661,52.588 3.661,49.389 18.661,49.389 18.661,46.15 3.661,46.15 3.661,42.911 18.661,42.911 18.661,39.672 3.661,39.672 3.661,36.434 18.661,36.434 18.661,33.195 3.661,33.195 3.661,29.956 18.661,29.956 18.661,26.717 3.661,26.717 3.661,23.478 18.661,23.478 18.661,20.239 3.661,20.239 3.661,17 18.339,17 18.339,13.761 6.251,13.761 6.251,10.522 13.803,10.522 13.803,7.283 5.223,7.283 0,14.58 0,59.411 3.661,59.411
GND on Bottom Layer "Bottom Layer-GND" (solid, pour order 80): 22.006,86.146 0,86.146 0,59.849 22.006,59.849
no net on Bottom Layer "Bottom Layer-No Net" (solid, pour order 66): 8.89,77.394
NetC22_1 on Bottom Layer "Top Layer-NetC28_1" (solid, pour order 48): 3.661,55.867 18.661,55.867 18.661,52.588 3.661,52.588 3.661,49.389 18.661,49.389 18.661,46.15 3.661,46.15 3.661,42.911 18.661,42.911 18.661,39.672 3.661,39.672 3.661,36.434 18.661,36.434 18.661,33.195 3.661,33.195 3.661,29.956 18.661,29.956 18.661,26.717 3.661,26.717 3.661,23.478 18.661,23.478 18.661,20.239 3.661,20.239 3.661,17 18.339,17 18.339,13.761 6.251,13.761 6.251,10.522 13.803,10.522 13.803,7.283 5.223,7.283 0,14.58 0,59.411 3.661,59.411
GND on Bottom Layer "Top Layer-GND" (solid, pour order 46): 18.661,52.628 18.661,55.867 3.658,55.867 3.658,59.411 22.006,59.411 22.006,15.806 21.504,13.621 12.295,0.477 11,0.006 9.368,0.859 4.87,7.283 13.803,7.283 13.803,10.522 6.251,10.522 6.251,13.761 18.339,13.761 18.339,17 3.661,17 3.661,20.239 18.661,20.239 18.661,23.478 3.661,23.478 3.661,26.717 18.661,26.717 18.661,29.956 3.661,29.956 3.661,33.195 18.661,33.195 18.661,36.434 3.661,36.434 3.661,39.672 18.661,39.672 18.661,42.911 3.661,42.911 3.661,46.15 18.661,46.15 18.661,49.389 3.661,49.389 3.661,52.628

## Keep-outs
Keep-Out Layer:
  lines w0.4: 1.506,100.006 ccw(c1.506,98.506) 0.006,98.506 0.001,98.506 0.001,60.198 0.501,60.198 cw(c0.508,59.698) 0.508,59.198 0.006,59.198 0.006,15.806 ccw(c5.006,15.806) 0.911,12.938 9.368,0.859 ccw(c11.006,2.006) 12.645,0.859 21.102,12.938 ccw(c17.006,15.806) 22.006,15.806 22.006,15.806 22.006,59.198 21.506,59.198 cw(c21.506,59.698) 21.513,60.198 22.006,60.198 22.006,98.506 ; 1.506,100.006 20.506,100.006 ; 1.506,100.006 1.506,100.006 ; 20.506,100.006 cw(c20.506,98.506) 22.006,98.506 ; 20.506,100.006 20.506,100.006 ; 22.006,98.506 22.006,98.506

## Silkscreen, mask and mechanical layers (free items; w line width, h text height)
Top Overlay:
  text "RX" at 2.235,83.464 h0.66
  text "TX" at 2.235,82.22 h0.66
  text "V+" at 2.235,79.654 h0.66
  text "TMS" at 2.235,78.384 h0.66
  text "TCK" at 4.039,77.14 h0.66
  text "RES" at 4.039,75.895 h0.66
  text "GND" at 4.039,74.651 h0.66
Mechanical 1:
  lines w0.013: 0,59.198 0.5,59.198 ; 0.001,98.506 0.001,60.198 0.501,60.198 cw(c0.508,59.698) 0.508,59.198 ; 0.006,59.198 0.006,15.806 ccw(c5.006,15.806) 0.911,12.938 9.368,0.859 ccw(c11.006,2.006) 12.645,0.859 21.102,12.938 ccw(c17.006,15.806) 22.006,15.806 ; 0.006,98.506 cw(c1.506,98.506) 1.506,100.006 20.506,100.006 cw(c20.506,98.506) 22.006,98.506 22.006,60.198 ; 22.006,15.806 22.006,59.198 21.506,59.198 cw(c21.506,59.698) 21.513,60.198 22.013,60.198